# Altium PCB Keo_truot_cua_tu_6_sensor_2_PCB.PcbDoc
Units mil, origin at the board's own origin, x right, y up, seen from the top; angles counter-clockwise.
Board outline 1968.5 x 1181.1 mil, 2 copper layers (Top Layer, Bottom Layer); 35 components, 39 nets, 147 pads, 45 vias.
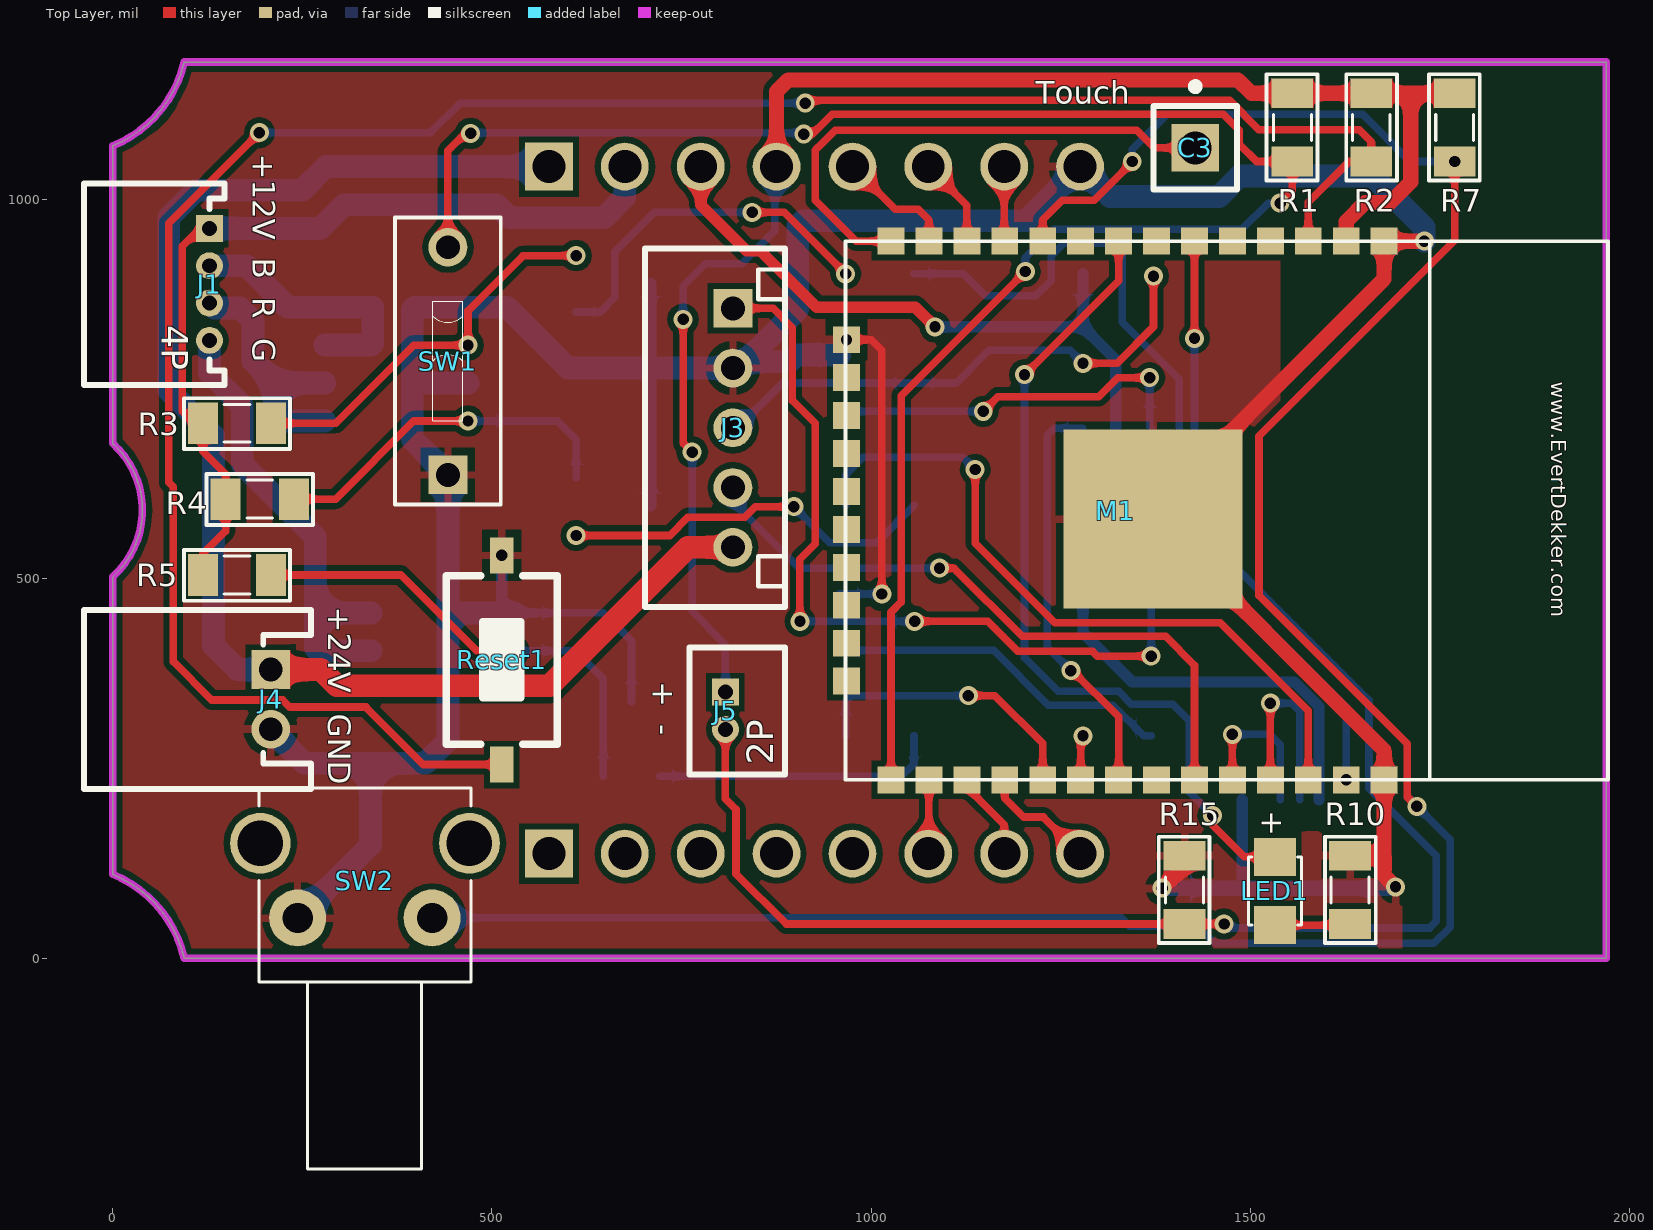
[diagram p0: Top Layer view]
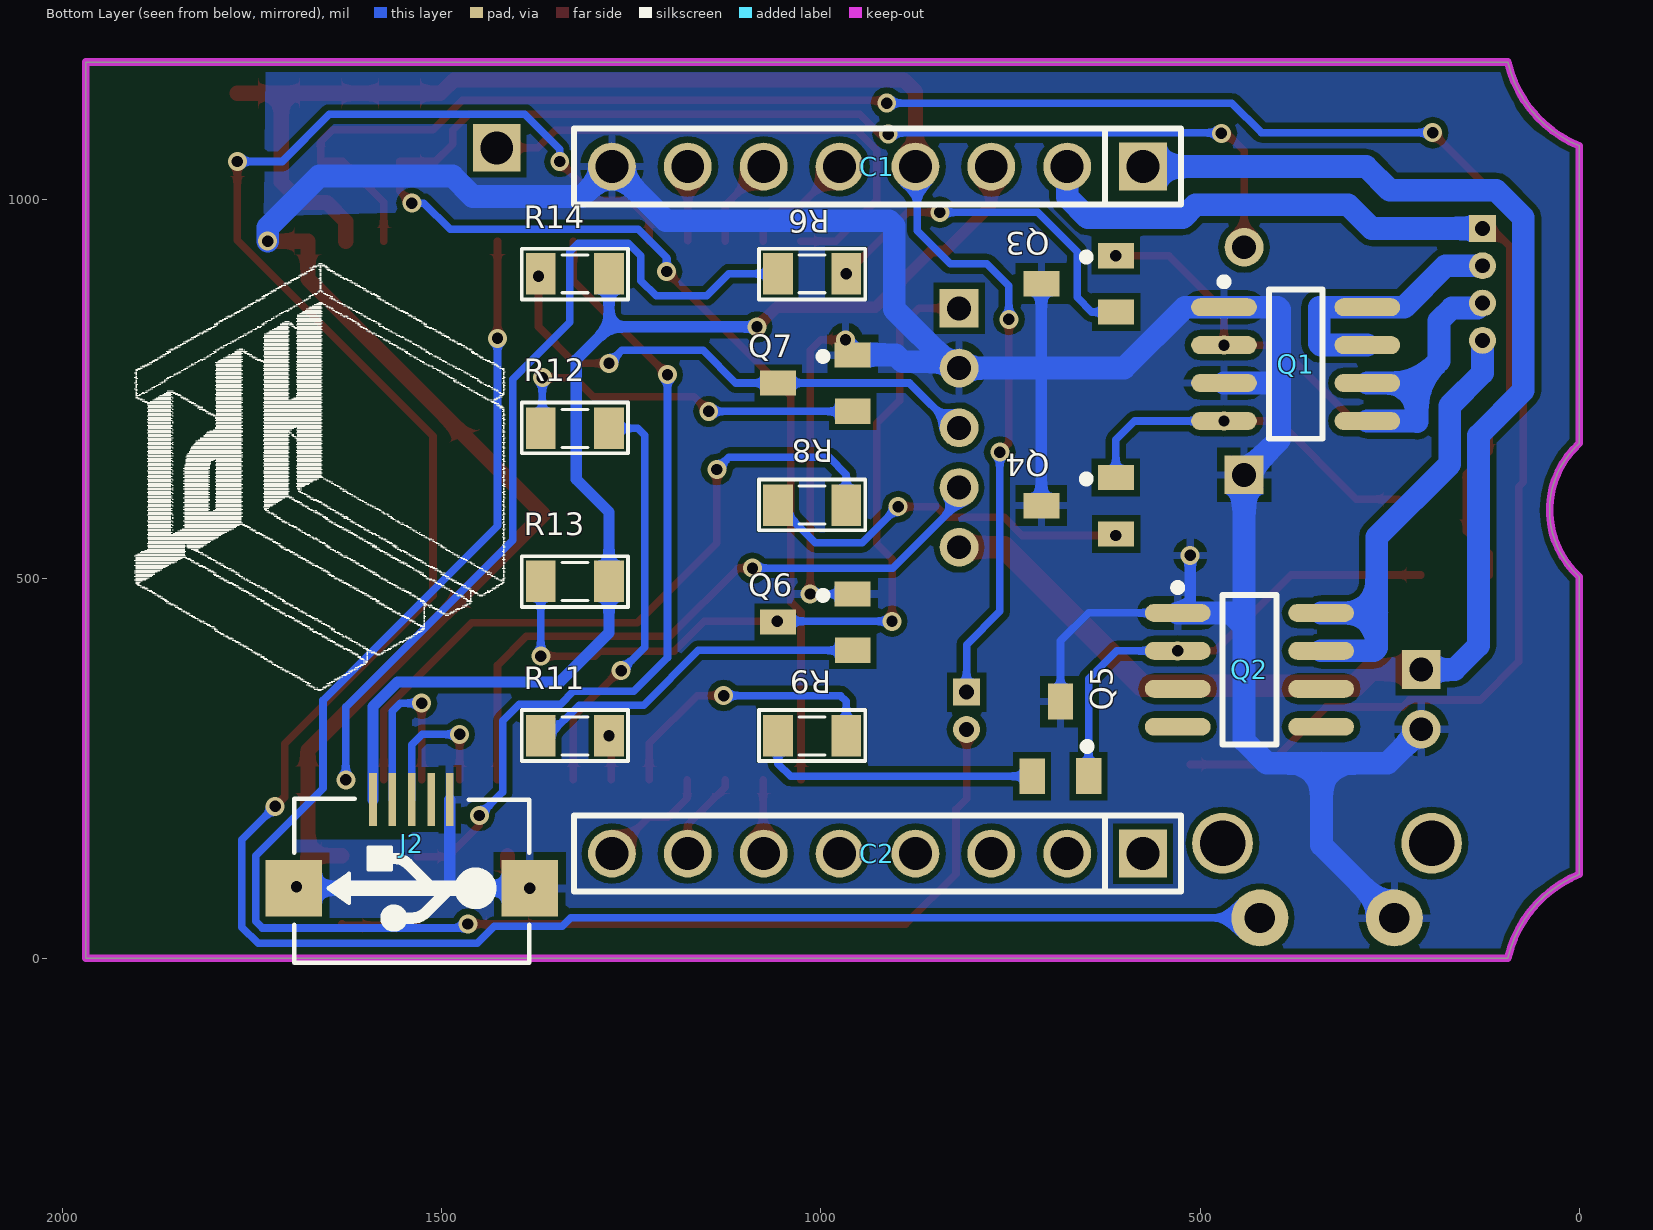
[diagram p1: Bottom Layer view, seen from below]
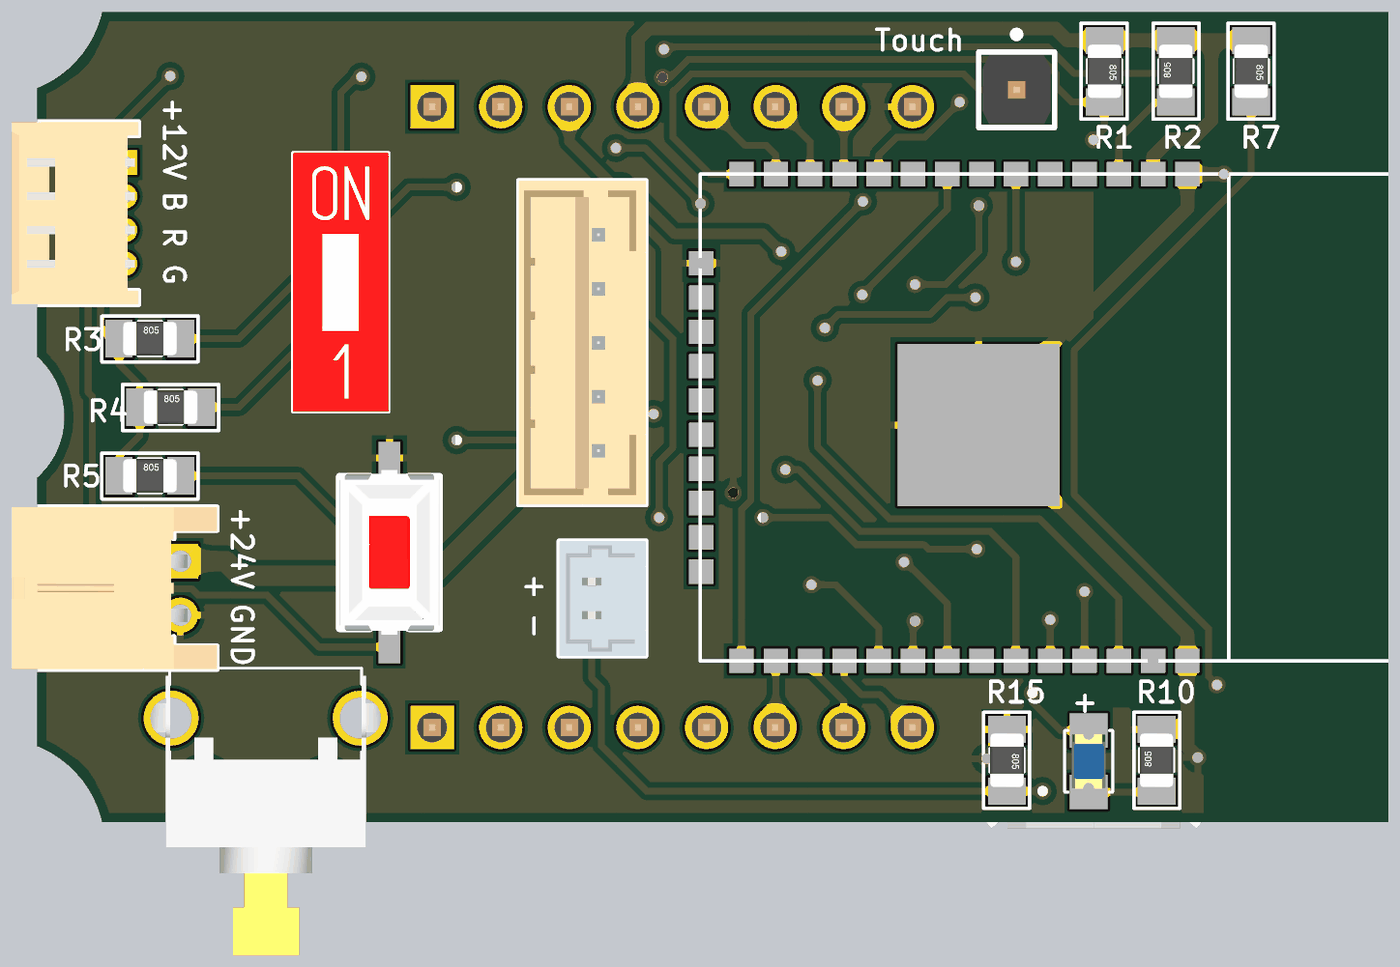
[diagram p2: 3D render of the assembled board from above, using the file's embedded part models]
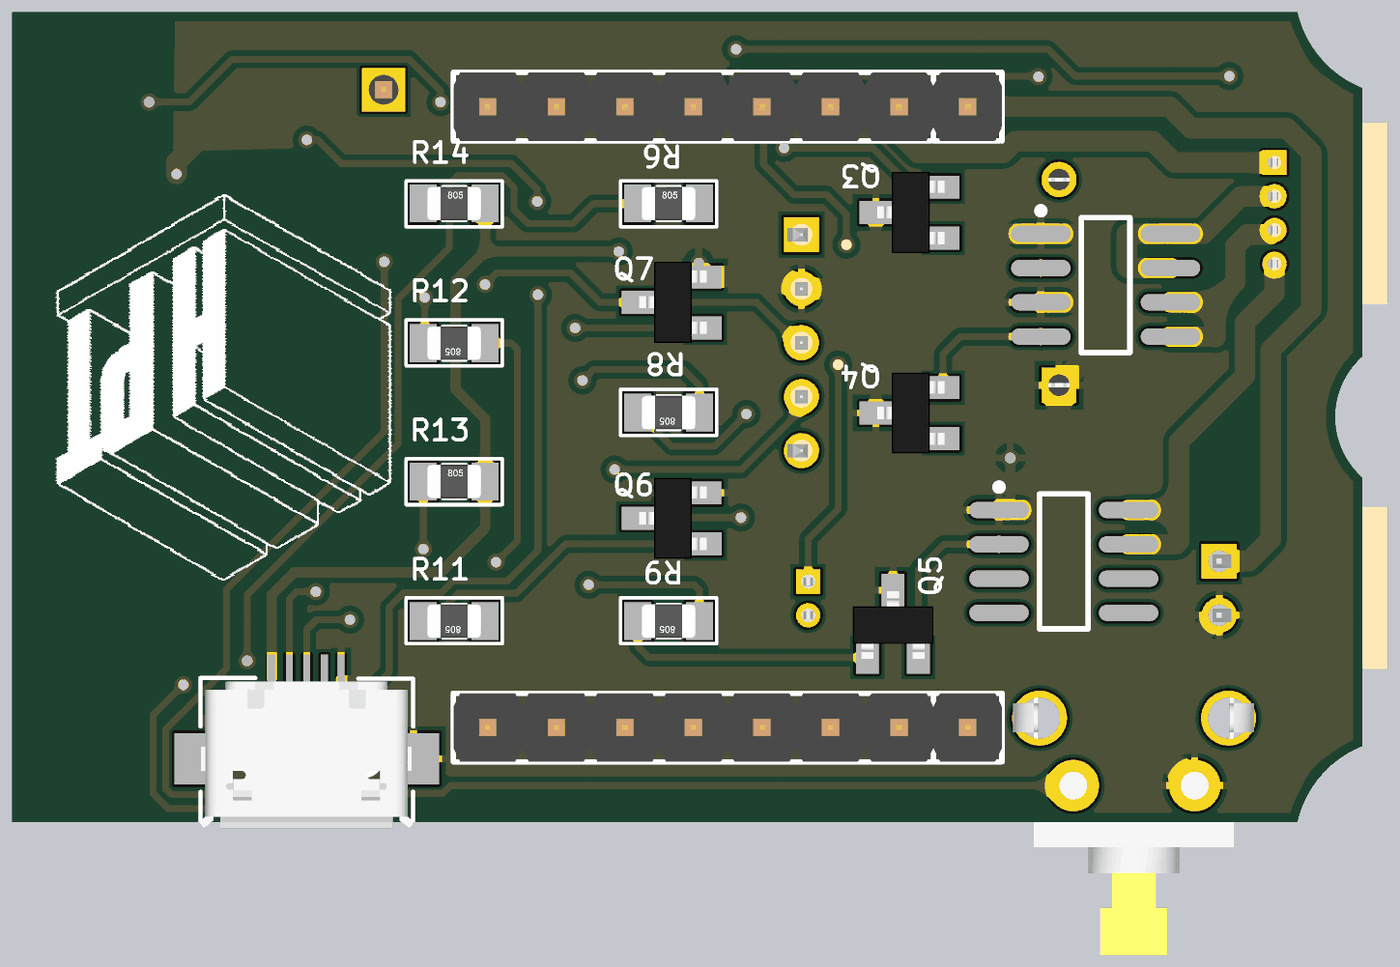
[diagram p3: 3D render of the assembled board from below, using the file's embedded part models]

## Layer stack, top to bottom
Top Solder: solder mask 0.4, Solder Resist, Dk 3.5
Top Layer: signal copper 1.4
Dielectric 1: dielectric 12.6, FR-4, Dk 4.8
Bottom Layer: signal copper 1.4
Bottom Solder: solder mask 0.4, Solder Resist, Dk 3.5

## Board outline
0,110.55 0,502.52 ccw(c-78.74,590.55) 0,678.59 0,1070.55 ccw(c-59.06,1216.54) 94.39,1181.1 1968.5,1181.1 1968.5,0 94.39,0 ccw(c-59.06,-35.43)

## Design rules (kind name [scope] priority, off if disabled: settings)
Clearance [All] p1: gap=8
PolygonConnect [All] p1: connectstyle=Relief reliefconductorwidth=10 reliefentries=4 polygonreliefangle="90 Angle" airgapwidth=10
RoomDefinition Keo_truot_cua_tu_6_sensor_2_Schematic [InComponentClass('Keo_truot_cua_tu_6_sensor_2_Schematic')] p1: confinementstyle=ConfineIn formatcopy=TRUE lockcomponents=FALSE outline 2013.76,56.12 4250.76,56.12 4250.76,1215.12 2013.76,1215.12
RoutingVias [All] p1: holewidth=15 width=25 viastyle="Through Hole" minholewidth=15 minwidth=25 maxholewidth=28 maxwidth=50
SolderMaskExpansion [All] p1: expansion=4
Width [All] p1: maxlimit=80 minlimit=8 preferedwidth=10
30 further rules are at their usual default settings.

## Components (designator, comment, footprint, x,y, rotation, side; value= is the part's Value field where it differs from the comment)
C1 "JP8" JP8-D1T 575.2,1043.31 r0 bottom
C2 "JP8" JP8-D1T 575.2,137.8 r0 bottom
C3 "JP1" JP1-D1T 1427,1068 r0 top
J1 "653004117322" 653004117322 54.91,888 r270 top
J2 "USB-5" USB-M1 1539,209 r0 bottom
J3 "62000511622" 62000511622 794,699 r90 top
J4 "62000211722" 62000211722 112.01,341 r270 top
J5 "653002114822" 653002114822 823.53,326 r90 top
LED1 "LED" LED-0805-Blue 1532.03,133.5 r270 top
M1 "ESP32S_Module" ESP32S 966,945 r270 top
Q1 "IRF7101" SO-8_N 374,783 r180 bottom
Q2 "IRF7101" SO-8_N 435,380 r180 bottom
Q3 "A1015" SOT23B 660,889 r90 bottom
Q4 "A1015" SOT23B 660,596.5 r90 bottom
Q5 "A1015" SOT23B 684,289 r180 bottom
Q6 "C1815" SOT23B 1007,443 r90 bottom
Q7 "C1815" SOT23B 1007,758 r90 bottom
R1 "Res" RES-SMD-0805 1555,1095 r270 top
R2 "Res" RES-SMD-0805 1659,1095 r90 top
R3 "Res" RES-SMD-0805 164,705 r0 top
R4 "Res" RES-SMD-0805 194,605 r0 top
R5 "Res" RES-SMD-0805 164,505 r0 top
R6 "Res" RES-SMD-0805 1011.34,902 r180 bottom
R7 "Res" RES-SMD-0805 1769,1095 r270 top
R8 "Res" RES-SMD-0805 1011.34,597 r0 bottom
R9 "Res" RES-SMD-0805 1011.34,293 r0 bottom
R10 "Res" RES-SMD-0805 1631,90 r90 top
R11 "Res" RES-SMD-0805 1324,293 r0 bottom
R12 "Res" RES-SMD-0805 1324,698.33 r0 bottom
R13 "Res" RES-SMD-0805 1324,496.67 r180 bottom
R14 "Res" RES-SMD-0805 1324,902 r180 bottom
R15 "Res" RES-SMD-0805 1413,90 r270 top
Reset1 "SW" SW1-SMD 513,393 r90 top
SW1 "SW" SW-DIP1-1 442,787.03 r0 top
SW2 "SW" SW1-DIP 244,53 r0 top

## Footprints (in the part's own frame and the unit in brackets; to place one, negate y for a bottom-side part, rotate by r counter-clockwise, add the part's x,y. Pads: shape width x height; smd on the part's side, far side on the other; paste and mask are expansions set on the pad)
62000211722 [mm] "2.00mm Male Horizontal Shrouded Header, 2p"
  rect 1.3x1.3 hole 0.8: 1(-1,2.45)
  round 1.3 hole 0.8: 2(1,2.45)
  silkscreen extent -3,-3.8 3,3.8, body extent -3,-3.8 3,3.8, height 4.85
62000511622 [mm] "2.00mm Male Vertical Shrouded Header, 5p"
  rect 1.3x1.3 hole 0.8: 1(4,-0.6)
  round 1.3 hole 0.8: 2(2,-0.6) 3(0,-0.6) 4(-2,-0.6) 5(-4,-0.6)
  silkscreen extent -6,-2.35 6,2.35, body extent -6,-2.35 6,2.35, height 6.15
653002114822 [mm] "1.25mm Male Vertical Shrouded Header, 2p"
  rect 0.9x0.9 hole 0.5: 1(0.625,0.4)
  round 0.9 hole 0.5: 2(-0.625,0.4)
  silkscreen extent -2.12,-1.6 2.12,1.6, body extent -2.12,-1.6 2.12,1.6, height 4.25
653004117322 [mm] "1.25mm Male Horizontal Shrouded Header, 4p"
  rect 0.9x0.9 hole 0.5: 1(-1.875,1.85)
  round 0.9 hole 0.5: 2(-0.625,1.85) 3(0.625,1.85) 4(1.875,1.85)
  silkscreen extent -3.37,-2.35 3.37,2.35, body extent -3.37,-2.35 3.37,2.35, height 3.55
ESP32S [mm] "ESP32S-Module"
  rect 0.9x0.9 smd: 1(0,18.034) 2(0,16.764) 3(0,15.494) 4(0,14.224) 5(0,12.954) 6(0,11.684) 7(0,10.414) 8(0,9.144) 9(0,7.874) 10(0,6.604) 11(0,5.334) 12(0,4.064) 13(0,2.794) 14(0,1.524) 15(3.3,0.034) 16(4.57,0.034) 17(5.84,0.034) 18(7.11,0.034) 19(8.38,0.034) 20(9.65,0.034) 21(10.92,0.034) 22(12.19,0.034) 23(13.46,0.034) 24(14.73,0.034) 25(18.034,1.524) 26(18.034,2.794) 27(18.034,4.064) 28(18.034,5.334) 29(18.034,6.604) 30(18.034,7.874) 31(18.034,9.144) 32(18.034,10.414) 33(18.034,11.684) 34(18.034,12.954) 35(18.034,14.224) 36(18.034,15.494) 37(18.034,16.764) 38(18.034,18.034)
  rect 6x6 smd: 101(9.3,10.3)
  silkscreen extent 0,0 18.03,25.53, body extent 0,0 18.03,25.53, height 2
JP1-D1T [mm] "1pins, 1 row, straight, gold plating"
  rect 1.6x1.6 hole 1.1: 1(0,0)
  silkscreen extent -1.4,-1.4 1.4,2.17, body extent -1.27,-1.27 1.27,1.27, height 8.54
JP8-D1T [mm] "8 pins, 1 row, straight, gold plating"
  rect 1.6x1.6 hole 1.1: 1(0,0)
  round 1.6 hole 1.1: 2(2.54,0) 3(5.08,0) 4(7.62,0) 5(10.16,0) 6(12.7,0) 7(15.24,0) 8(17.78,0)
  silkscreen extent -1.27,-1.27 19.05,1.27, body extent -1.27,-1.27 19.05,1.27, height 8.54
LED-0805-Blue [mil]
  rect 50x55 smd: 1(0,0) 2(90,0)
  silkscreen extent 0,-35 90,35, body extent 5,-25 85,25, height 43
RES-SMD-0805 [mil]
  rect 39.37x55 smd: 1(-45,0) 2(45,0)
  silkscreen extent -70,-34 70,33, body extent -39,-25 39,25, height 31
SO-8_N [mm] "SOIC, 8-Leads, Body 4.9x3.9mm, Pitch 1.27mm, IPC Medium Density"
  oval 2.2x0.6 smd: 1(-2.4,1.905) 2(-2.4,0.635) 3(-2.4,-0.635) 4(-2.4,-1.905) 5(2.4,-1.905) 6(2.4,-0.635) 7(2.4,0.635) 8(2.4,1.905)
  silkscreen extent -2.53,-2.5 0.9,2.88, body extent -2,-2.5 2,2.5, height 1.75
SOT23B [mm] "SOT 23B"
  rect 0.85x1.2 smd: 1(0.94,-1.245) 2(0,1.25) 3(-0.95,-1.25)
  silkscreen extent 0.77,-0.38 1.02,-0.13, body extent -1.5,-1.3 1.5,1.2, height 1.06
SW1-DIP [mil]
  round 75 hole 40: 1(0,0) 2(177.17,0)
  round 80 hole 60: ""(-49.21,98.42) ""(226.38,98.42)
  silkscreen extent -51,-331 228,171, body extent -87,-398 265,160, height 283
SW1-SMD [mm]
  rect 1.2x0.8 smd: 1(-3.5,0) 2(3.5,0)
  silkscreen extent -2.82,-1.85 2.82,1.85, body extent -3.05,-1.85 3.05,1.85, height 2.5
SW-DIP1-1 [mm] "01p, 2.54mm Pitch, Horizontal, Box Type, THT, flat Actuator, red, without Tape, Tube"
  rect 1.3x1.3 hole 0.8: 1(0,-3.81)
  round 1.3 hole 0.8: 2(0,3.81)
  silkscreen extent -1.77,-4.8 1.77,4.8, body extent -1.77,-4.8 1.77,4.8, height 5.4
USB-M1 [mil]
  rect 10x70 smd: 1(51.18,0) 2(25.59,0) 3(0,0) 4(-25.59,0) 5(-50,0)
  rect 74.8x74.8 smd: 5(-155.51,116.84) 5(155.51,116.84)
  silkscreen extent -155,-1 155,215, body extent -157,5 158,218, height 107

## Part data
C1 C2 C3: "WR-PHD 2.54 mm Angled Socket Header"
J1: "WR-WTB 1.25mm Male Horizontal Shrouded Header, 4p"
J3: "WR-WTB 2.00mm Male Vertical Shrouded Header, 5p"
J4: "WR-WTB 2.00mm Male Horizontal Shrouded Header, 2p"
J5: "WR-WTB 1.25mm Male Vertical Shrouded Header, 2p"
LED1: library part "LED SMD"
M1: "Esp-32S"
Q1 Q2: "HEXFET Power MOSFET"
Q3 Q4 Q5: "PNP 600mW, ECB"
Q6 Q7: "NPN 600mW, ECB"
R1 R2 R3 R4 R5 R6 R7 R8 R9 R10 R11 R12 R13 R14 R15: library part Res-SMD, "Resistor"
Reset1 SW1 SW2: library part SW2, "Switch button 2 pin"

## Via types
v1: diameter 25, hole 15, Top Layer to Bottom Layer, tented both sides, 45 vias

## Nets (pads, with @x,y where several pads share a name; then routed paths per layer and width w, separated by ;. In a path a pad name is that pad's centre, name@x,y a point inside that pad or via, vN(x,y) a via of type N, cw(c..) or ccw(c..) an arc to the next point about the centre after c; other vN are vias at no path point)
3.3V: C1.4 J5.1 M1.2 R1.1 R2.2 R7.1 | length 2050.8
  Top Layer w10: v1(752,842) 752,679 v1(764,667)
  Top Layer w20: C1.4 875.2,1142.2 890.5,1157.5 1483.48,1157.5 1500.98,1140 R1.1 1711,1140 ; M1.2 1626,971 1651,996 1684,996 1711,1023 1711,1140 ; R7.1 1711,1140
  Bottom Layer w10: v1(752,842) 752,886 781,915 829,915 873,959 873,1041.11 C1.4 ; v1(764,667) 764,457 807.78,413.22 J5.1
5V: C1.3 J2.1 R13.2 R14.2 | length 1603.7
  Top Layer w15: C1.3 775.2,992.8 836,932 854,932 928,858 1058,858 v1(1084,832)
  Bottom Layer w15: v1(1084,832) 1279,832 ; R14.2 1279,832 ; J2.1 1590.18,331.64 1557.82,364 1344,364 1279,429 R13.2 1279,588 1322,631 1322,789 1279,832
12V: C1.2 J1.1 R3.1 R4.1 R5.1 | length 1139.9
  Top Layer w10: R5.1 119,533 149,563 R4.1 149,638 119,668 R3.1 108,705 92,721 92,938 115.82,961.82 J1.1
  Bottom Layer w30: J1.1 273.82,961.82 305,993 506,993 523,976 648,976 675.2,1003.2 C1.2
24V: C1.1 J3.5 J4.1 | length 1899.7
  Top Layer w30: J4.1 274.37,380.37 295.74,359 576,359 758.52,541.52 J3.5
  Bottom Layer w30: J4.1 164.63,380.37 133,412 133,689 74,748 74,976.03 109.97,1012 250,1012 281.31,1043.31 C1.1
ANALOG: J5.2 M1.6 R15.2 | length 2181
  Top Layer w10: J5.2 807.78,210.22 821.69,196.31 821.69,111.31 888,45 R15.2 v1(1465,45) ; v1(1426,817) M1.6
  Bottom Layer w10: v1(1426,817) 1426,570 1656,340 1656,223.86 1744.91,134.94 1744.91,48.37 1736.3,39.76 1470.24,39.76 v1(1465,45)
FG: J3.4 M1.33 | length 867.5
  Top Layer w10: v1(1090,514) 1109,514 1199,424 1388,424 1426,386 M1.33
  Bottom Layer w10: J3.4 817.62,601.38 905,514 v1(1090,514)
FR: M1.31 R12.1 | length 545
  Top Layer w10: v1(1263,379) 1265,379 1326,318 M1.31
  Bottom Layer w10: v1(1263,379) 1232,410 1232,689 1241.33,698.33 R12.1
GND: C1.8 J2.5 J3.2 J4.2 M1.1 M1.15 M1.38 M1.101 Q1.1 Q1.3 Q2.1 Q3.2 Q4.2 Q5.2 Q6.1 Q7.1 R10.2 R15.1 Reset1.2 SW1.1 SW2.1 | length 5783
  Top Layer w10: v1(967.34,815.08) 999.92,815.08 1014,801 v1(1014,480)
  Top Layer w20: v1(1383.49,92.16) 1413,121.67 R15.1 ; R10.2 1676,135 ; v1(1691,94) 1676,109 1676,135 ; v1(1729,945) M1.1 1676,895 1365.5,584.5 1676,274 M1.38 1676,135
  Bottom Layer w10: Q2.1 647,455 684,418 Q5.2 ; Q6.1 v1(1014,480)
  Bottom Layer w15: v1(513,530.8) 513,471.49 Q2.1 ; Q4.2 709.21,776.53 708,777.74 709.21,778.95 Q3.2 ; 1489,92.16 J2.5@1489,209
  Bottom Layer w20: Q7.1 958,805.74 v1(967.34,815.08) ; v1(1383.49,92.16) J2.5@1689.16,92.16
  Bottom Layer w30: J4.2 253.09,257 340,257 ; SW2.1 340,149 340,257 ; Q1.3 396,758 395,759 ; Q2.1 460,455 442,437 ; Q7.1 901,795 892,786 J3.2@833.68,786 ; v1(1729,945) 1729,963 1661,1031 1485.52,1031 1458.52,1004 1314.5,1004 C1.8 1203.89,972 910,972 903,965 903,855.32 J3.2@833.68,786 ; 340,257 412,257 442,287 442,437 ; 395,759 395,684.03 SW1.1 442,437 ; 395,759 395,855 398,858 Q1.1 520,858 600.26,777.74 708,777.74 J3.2 817.62,786 J3.2@833.68,786
LEDB: M1.37 R6.1 | length 1157.5
  Bottom Layer w10: R6.1 1121,902 1150,873 1217,873 1237,893 1237,925.57 1253.93,942.5 1319.5,942.5 1331,931 1331,838 1406,763 1406,551 1626,331 v1(1626,235)
LEDG: M1.29 R9.1 | length 382.3
  Top Layer w10: v1(1128,346) 1163,346 1226,283 M1.29
  Bottom Layer w10: R9.1 966.33,338.33 974,346 v1(1128,346)
LEDR: M1.36 R8.1 | length 945.6
  Top Layer w10: v1(1137,644) 1137,547 1242,442 1460,442 1576,326 M1.36
  Bottom Layer w10: R8.1 966.33,637.33 989,660 1121,660 v1(1137,644)
NetJ1_2: J1.2 Q1.7 Q1.8 | length 350.2
  Bottom Layer w30: J1.2 176.39,912.61 231,858 Q1.8 343,858 343,810 341,808 Q1.7
NetJ1_3: J1.3 Q1.5 Q1.6 | length 343.4
  Bottom Layer w30: J1.3 134.24,856.9 168.1,856.9 185,840 185,787 214,758 ; Q1.5 215,708 214,707 214,758 ; Q1.6 214,758
NetJ1_4: J1.4 Q2.7 Q2.8 | length 611.5
  Bottom Layer w30: J1.4 127.75,771.25 171,728 171,651 267,555 267,455 ; Q2.7 271,405 267,409 267,455 ; Q2.8 267,455
NetJ3_1: J3.1 Q6.2 R13.1 | length 1077.4
  Top Layer w10: J3.1 870.52,856.48 896,831 896,735 926,705 926,546 906,526 v1(906,444) ; v1(1057.21,444) 1153.54,444 1193.04,404.5 1291.56,404.5 1298.06,398 v1(1369,398)
  Bottom Layer w10: v1(906,444) v1(1057.21,444) ; v1(1369,398) R13.1
NetJ3_3: J3.3 Q7.2 R14.1 | length 690.6
  Top Layer w10: v1(1279,784) 1324,784 1372,832 v1(1372,899)
  Bottom Layer w10: J3.3 824,699 883,758 Q7.2 1112,758 1155,801 1262,801 v1(1279,784)
NetLED1_1: LED1.1 M1.8 | length 1101.8
  Top Layer w10: v1(1202,769) 1326,893 M1.8 ; v1(1450,188) 1450,175 1491.5,133.5 LED1.1
  Bottom Layer w10: v1(1202,769) 1202,396 1246.5,351.5 1325.96,351.5 1342.96,334.5 1397.5,334.5 1419,313 1419,219 v1(1450,188)
NetLED1_2: LED1.2 R10.1 | length 99.6
  Top Layer w10: LED1.2 1629.5,43.5 R10.1
NetM1_3: M1.3 R2.1 Reset1.1 | length 2926.2
  Top Layer w10: v1(193.54,1088) 74,968.46 74,627 80,621 80,391 130.78,340.22 224.45,340.22 233.67,331 334,331 409.8,255.2 Reset1.1 ; v1(913,1127) 916.5,1130.5 1472.5,1130.5 1511,1092 1643,1092 1659,1076 R2.1 1630,1050 1576,996 M1.3
  Bottom Layer w10: v1(193.54,1088) 419,1088 458,1127 v1(913,1127)
NetM1_10: M1.10 R7.2 SW2.2 | length 3249.5
  Top Layer w10: M1.10 1226,973 1251.81,998.81 1293.63,998.81 1344,1049.18 v1(1344,1050) ; v1(1719,200) 1706.72,212.28 1706.72,282.28 1511,478 1511,688.11 1769,946.11 v1(1769,1050)
  Bottom Layer w10: SW2.2 1329.46,53 1340.7,41.76 1430.24,41.76 1452.5,19.5 1741.5,19.5 1762.91,40.91 1762.91,156.09 v1(1719,200) ; v1(1344,1050) 1344,1066.38 1390.12,1112.5 1647.5,1112.5 1710,1050 v1(1769,1050)
NetM1_25: M1.25 R1.2 SW1.2 | length 2496.2
  Top Layer w10: SW1.2 442,1064 465,1087 v1(472,1087) ; v1(911,1086) 922,1086 948.5,1112.5 1463.88,1112.5 1485,1091.38 1485,1073 1508,1050 R1.2 1555,1011 v1(1539,995) ; M1.25 1026,455.94 1039.5,469.44 1039.5,741.5 v1(1203,905)
  Bottom Layer w10: v1(472,1087) 472,1094 478.2,1087.8 909.2,1087.8 v1(911,1086) ; v1(1203,905) 1203,923 1240.5,960.5 1488.5,960.5 1523,995 v1(1539,995)
NetQ1_2: Q1.2 Q3.1 R3.2 | length 520.2
  Top Layer w10: R3.2 294,705 397,808 v1(468.49,808) 468.49,853.49 541,926 v1(611,926)
NetQ1_4: Q1.4 Q4.1 R4.2 | length 474.5
  Top Layer w10: R4.2 294,605 397,708 v1(468.49,708)
  Bottom Layer w10: v1(468.49,708) 586,708 611,683 Q4.1
NetQ2_2: Q2.2 Q5.1 R5.2 | length 622.7
  Top Layer w10: R5.2 380,505 480,405 v1(529.49,405)
  Bottom Layer w10: v1(529.49,405) 610,405 647,368 Q5.1
NetQ3_3: Q3.3 R6.2 | length 478.7
  Top Layer w10: v1(843,983) 885.34,983 v1(966.34,902)
  Bottom Layer w10: Q3.3 642.6,851.6 662,871 662,931 714,983 v1(843,983)
NetQ4_3: Q4.3 R8.2 | length 501.1
  Top Layer w10: v1(611,557) 734.4,557 758.4,581 832.94,581 846.94,595 v1(898,595)
  Bottom Layer w10: v1(898,595) 945.33,547.67 1007,547.67 R8.2
NetQ5_3: Q5.3 R9.2 | length 378.5
  Bottom Layer w10: Q5.3 1039.79,239.79 1056.33,256.33 R9.2
NetQ6_3: Q6.3 R11.2 | length 457.9
  Bottom Layer w10: Q6.3 1161.4,405.6 1233.5,333.5 1318.5,333.5 1359,293 R11.2
NetQ7_3: Q7.3 R12.2 | length 495.1
  Top Layer w10: v1(1147.6,720.6) 1167,740 1300,740 1325,765 v1(1367,765)
  Bottom Layer w10: Q7.3 v1(1147.6,720.6) ; v1(1367,765) 1367,700.33 R12.2
O1: C1.5 M1.13 | length 157.9
  Top Layer w10: C1.5 1031.5,987 1062,987 1076,973 M1.13
O2: C1.6 M1.12 | length 119.4
  Top Layer w10: C1.6 1126,992.5 M1.12
O3: C1.7 M1.11 | length 97.5
  Top Layer w10: M1.11@1175.2,945.81 C1.7
O4: C2.6 M1.26 | length 97.5
  Top Layer w10: C2.6 1076,138.6 M1.26
O5: C2.7 M1.27 | length 117.6
  Top Layer w10: M1.27 1126,225 1175.2,175.8 C2.7
O6: C2.8 M1.28 | length 153.5
  Top Layer w10: M1.28 1176,211 1201,186 1226.99,186 C2.8
PWM: M1.30 R11.1 | length 59.2
  Top Layer w10: M1.30 1276,290.01 v1(1279,293)
RX: J2.2 M1.35 | length 260.4
  Top Layer w10: M1.35 v1(1526,336)
  Bottom Layer w10: v1(1526,336) 1554,336 1564.59,325.41 J2.2
T0: C3.1 M1.14 | length 709.6
  Top Layer w10: M1.14 980,945 926,999 926,1064.94 929.06,1068 929.46,1068 952.46,1091 1350,1091 1373,1068 C3.1
TX: J2.3 M1.34 | length 200.8
  Top Layer w10: M1.34 v1(1476,295)
  Bottom Layer w10: v1(1476,295) 1525,295 1539,281 J2.3
pads on no net: C2.1 C2.2 C2.3 C2.4 C2.5 J2.4 M1.4 M1.5 M1.7 M1.9 M1.16 M1.17 M1.18 M1.19 M1.20 M1.21 M1.22 M1.23 M1.24 M1.32 Q2.3 Q2.4 Q2.5 Q2.6 SW2.

## Polygon pours and split planes (outlines as drawn)
GND on Top Layer "Bottom Layer-No Net" (solid, remove dead copper, pour order 4): 95,1181.1 1523,1181.1 1808,1181.1 1808,1022 1539,1022 1539,180 1539,166 1540,167 1700,167 1700,1 1699,0 95,0 95,16 ccw(c0,16) 0,111 0,502 9.71,511.71 ccw(c-61,582.42) 39,582.42 39,599 ccw(c-59.98,599) 10.01,668.99 0,679 0,1070 ccw(c0,1165) 95,1165 95,1181.1
GND on Bottom Layer "Bottom Layer-No Net" (solid, remove dead copper, pour order 6): 95,1181.1 1731,1181.1 1734,978 1537,983 1539,156 1696,156 1696,0 95,0 95,16 ccw(c0,16) 0,111 0,502 9.71,511.71 ccw(c-61,582.42) 39,582.42 39,601 ccw(c-57.57,601) 10.72,669.28 0,680 0,1070 ccw(c0,1165) 95,1165 95,1181.1

## Keep-outs
Keep-Out Layer:
  the board outline again, w10

## Silkscreen, mask and mechanical layers (free items; w line width, h text height)
Top Overlay:
  text "Touch" at 1217,1126 h30
  text "+12V" at 185,1060 h30 r270
  text "B" at 185,923 h30 r270
  text "R" at 185,871 h30 r270
  text "G" at 185,817 h30 r270
  text "+24V" at 284,463 h30 r270
  text "+" at 712,365 h30 r270
  text "GND" at 284,322 h30 r270
  text "-" at 712,308 h30 r270
  text "+" at 1515,194.99 h30 r270
Bottom Overlay:
  drawing of 2330 lines, arcs and shapes, not listed

## Text inside footprints (layer, text, board x,y; h text height)
J1: Top Overlay "4P" at 64.76,833.87 h35 r270
J5: Top Overlay "2P" at 870.77,255.13 h35 r90
M1: Top Overlay "www.EvertDekker.com" at 1896,760 h19.68 r270